# Altium PCB LM2587.PcbDoc
Units mm, origin at the board's own origin, x right, y up, seen from the top; angles counter-clockwise.
Board outline 56.5 x 36 mm, 2 copper layers (Top Layer, Bottom Layer), stack 1.571 mm thick; 11 components, 6 nets, 34 pads, 68 vias.
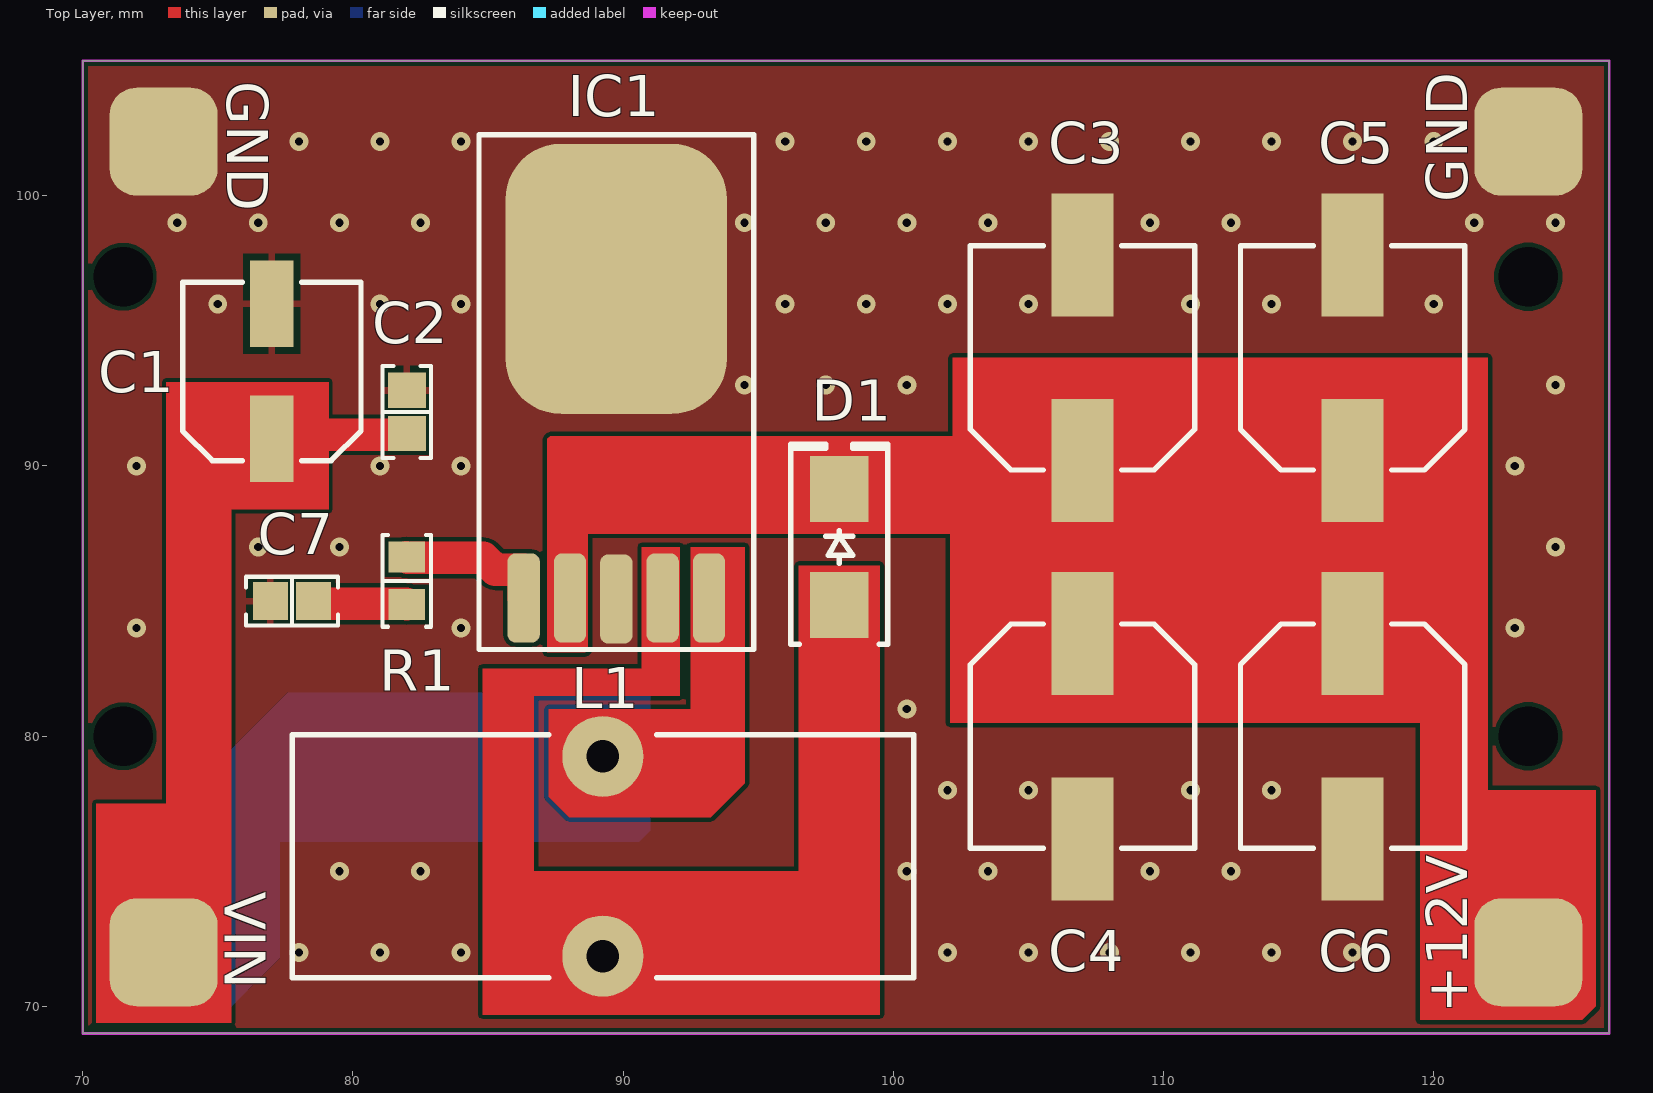
[diagram p0: Top Layer view]
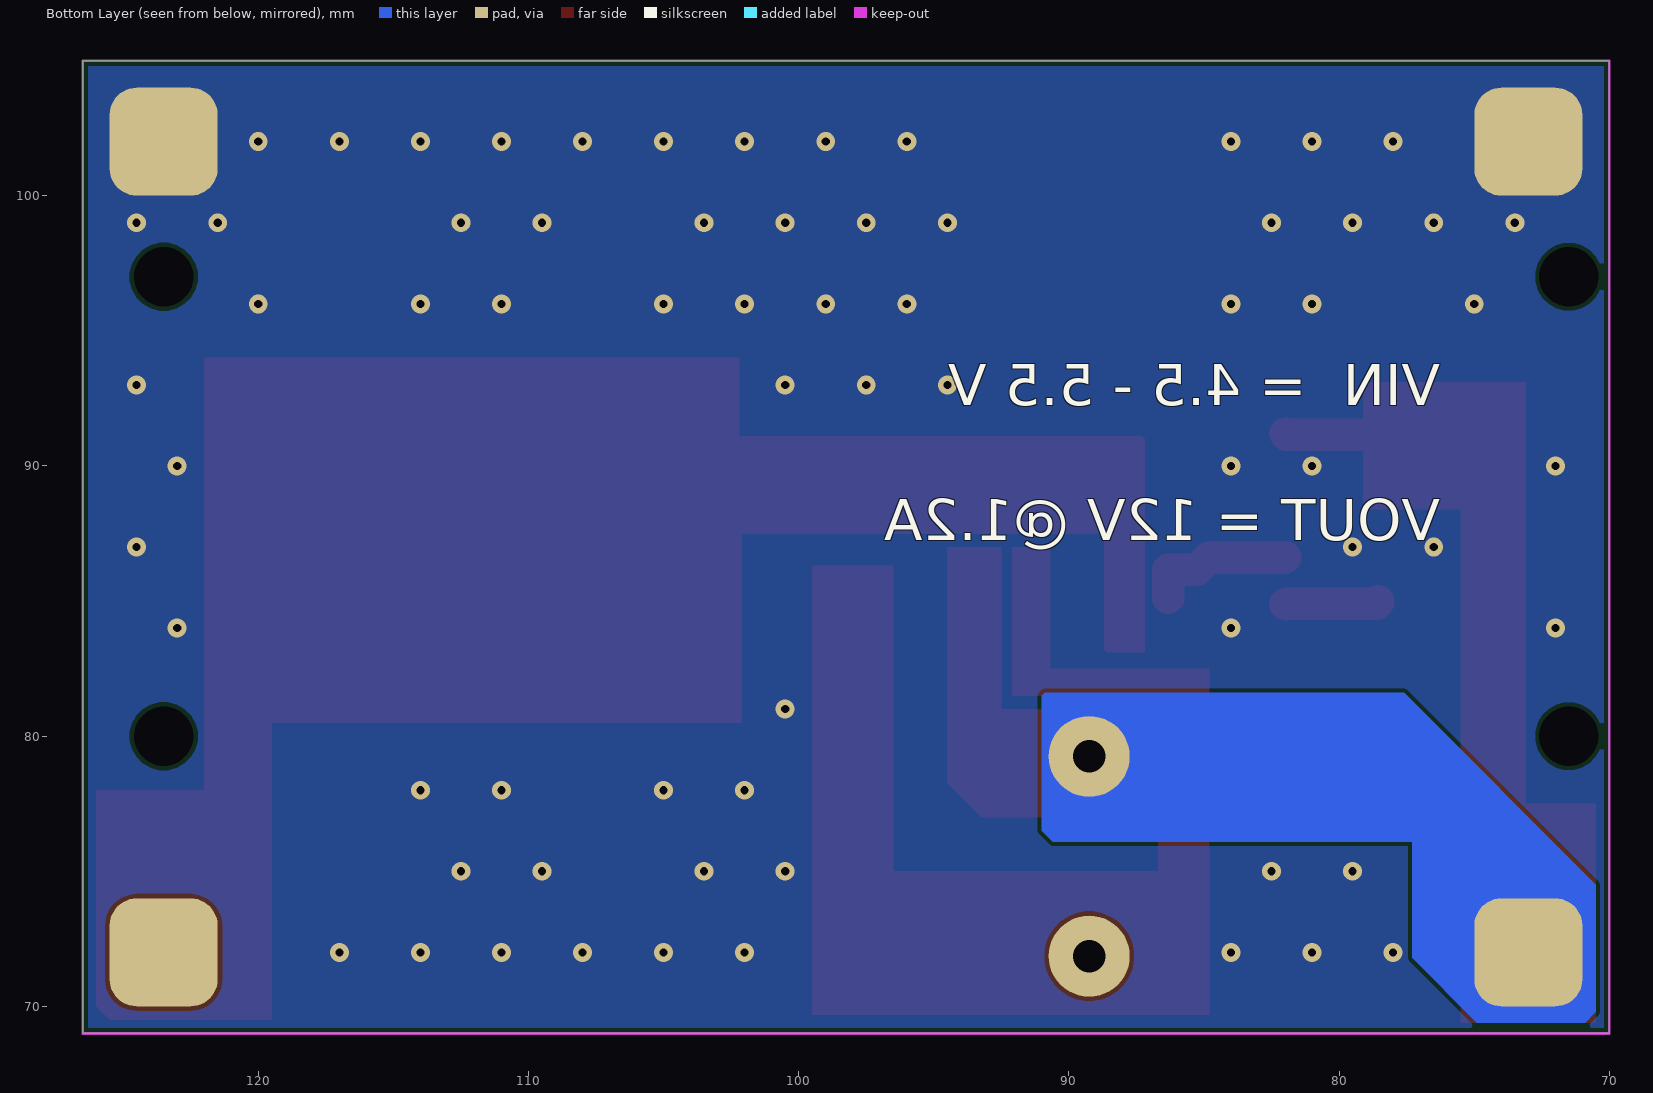
[diagram p1: Bottom Layer view, seen from below]
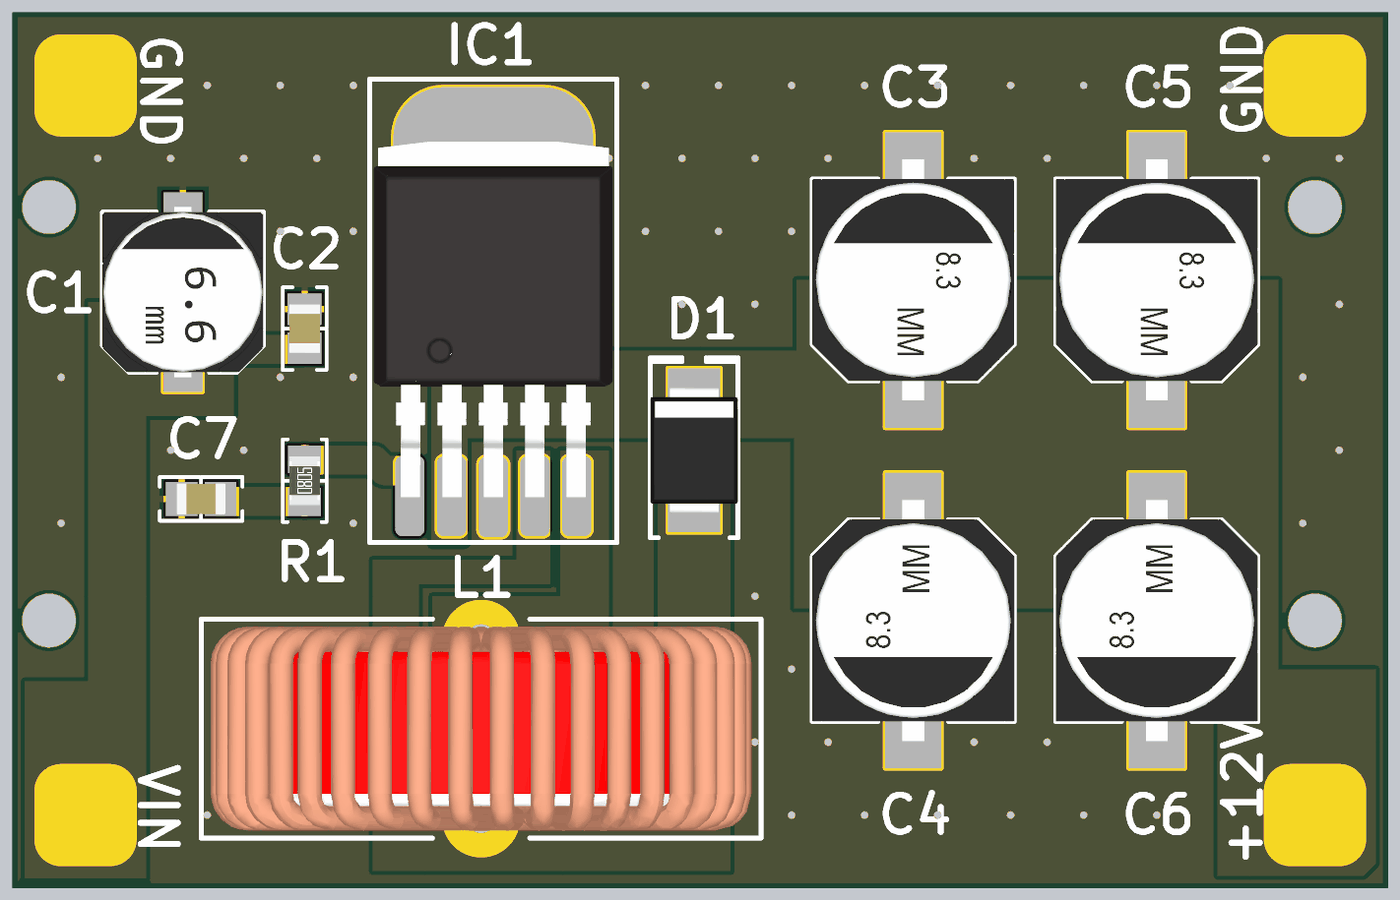
[diagram p2: 3D render of the assembled board from above, using the file's embedded part models]

## Layer stack, top to bottom
Top Solder: solder mask 0.0102, Solder Resist, Dk 3.5
Top Layer: signal copper 0.0356
Dielectric 1: dielectric 1.5, FR-4, Dk 4.8
Bottom Layer: signal copper 0.0356
Bottom Solder: solder mask 0.0102, Solder Resist, Dk 3.5

## Board outline
70,69 70,105 126.5,105 126.5,69

## Design rules (kind name [scope] priority, off if disabled: settings)
Clearance [All] p1: gap=0.152 ignorepadtopadclearanceinfootprint=FALSE
HoleSize [All] p1: absolutevalues=TRUE maxlimit=5 minlimit=0.025 maxpercent=80.000 minpercent=20.000
PolygonConnect [All] p1: connectstyle=Relief reliefconductorwidth=0.254 reliefentries=4 polygonreliefangle="90 Angle" airgapwidth=0.254
RoutingVias [All] p1: holewidth=0.711 width=1.27 viastyle="Through Hole" minholewidth=0.711 minwidth=1.27 maxholewidth=0.711 maxwidth=1.27
SolderMaskExpansion [All] p1: expansion=0.102 istentingtop=FALSE
Width [All] p1: maxlimit=2 minlimit=0.152 preferedwidth=1.2
29 further rules are at their usual default settings.

## Components (designator, comment, footprint, x,y, rotation, side; value= is the part's Value field where it differs from the comment)
C1 "100µF" "CAP ALSMD 6.6MM H5.4MM" 77,93.5 r90 top
C2 "0.1µF" "CAP 0805_2012" 82,92 r270 top
C3 "560µF" "CAP ALSMD 8.3MM H10.5MM" 107,94 r90 top
C4 "560µF" "CAP ALSMD 8.3MM H10.5MM" 107,80 r270 top
C5 "560µF" "CAP ALSMD 8.3MM H10.5MM" 117,94 r90 top
C6 "560µF" "CAP ALSMD 8.3MM H10.5MM" 117,80 r270 top
C7 "1µF" "CAP 0805_2012" 77.75,85 r0 top
D1 "STPS2L25U" "DO214AA SMB" 98,87 r90 top
IC1 "LM2587" "D2PAK - T0263" 89.75,91 r0 top
L1 "15µH" 7447070 89.25,75.555 r0 top
R1 "3 kOhms" "RES 0805_2012" 82,85.75 r90 top

## Footprints (in the part's own frame and the unit in brackets; to place one, negate y for a bottom-side part, rotate by r counter-clockwise, add the part's x,y. Pads: shape width x height; smd on the part's side, far side on the other; paste and mask are expansions set on the pad)
7447070 [mm] "0.984\" Dia x 0.433\" W (25.00mm x 11.00mm)"
  round 3 hole 1.2: 1(0,3.695) 2(0,-3.695)
  silkscreen extent -11.5,-4.5 11.5,4.5, body extent -11.11,-4.2 11.11,4.2, height 22.08
"CAP 0805_2012" [mm] "Chip Capacitor, 2-Leads, Body 2.00x1.20mm, IPC Medium Density"
  rect 1.3x1.4 smd: 1(-0.8,0) 2(0.8,0)
  silkscreen extent -1.7,-0.9 1.7,0.9, body extent -1,-0.64 1,0.64, height 1.26
"CAP ALSMD 6.6MM H5.4MM" [mm] "Aluminum Electrolytic Capacitor, Body 6.60x6.60x5.40mm, IPC Low Density"
  rect 3.2x1.6 smd: 1(-2.5,0) 2(2.5,0)
  silkscreen extent -3.3,-3.3 3.3,3.3, body extent -3.5,-3.3 3.5,3.3, height 5.4
"CAP ALSMD 8.3MM H10.5MM" [mm] "Aluminum Electrolytic Capacitor, Body 8.30x8.30x10.50mm, IPC Low Density"
  rect 4.55x2.3 smd: 1(-3.8,0) 2(3.8,0)
  silkscreen extent -4.15,-4.15 4.15,4.15, body extent -4.95,-4.15 4.95,4.15, height 10.5
"D2PAK - T0263" [mm]
  rrect50% 1.2x3.3 smd: 1(-3.429,-5.888) 2(-1.714,-5.888) 3(0,-5.923) 4(1.714,-5.888) 5(3.429,-5.888)
  rrect50% 8.2x10 smd: 3(0,5.923)
  silkscreen extent -5.08,-7.79 5.08,11.26, body extent -4.91,-5.92 4.91,8.68, height 4.22
"DO214AA SMB" [mm] "Molded Diode, 2-Leads, Body 4.31x3.62mm, IPC Medium Density"
  rect 2.45x2.15 smd: 1(-2.15,0) 2(2.15,0)
  silkscreen extent -3.6,-1.8 3.8,1.8, body extent -2.6,-1.8 2.6,1.8, height 2.4
"RES 0805_2012" [mm] "Chip Resistor, 2-Leads, Body 2.00x1.25mm, IPC Medium Density"
  rect 1.15x1.35 smd: 1(-0.875,0) 2(0.875,0)
  silkscreen extent -1.7,-0.9 1.7,0.9, body extent -1,-0.62 1,0.63, height 0.6

## Part data
C1: library part AVS107M16D16T-F, "CAP ALUM 100UF 20% 16V SMD", Device Package="Radial, Can - SMD", ESR (Equivalent Series Resistance)="4.3Ohm @ 120Hz", Lifetime @ Temp.="2000 Hrs @ 85°C", Manufacturer="Cornell Dubilier Electronics (CDE)", Operating Temperature="-40°C ~ 85°C", Ratings=AEC-Q200, Ripple Current @ High Frequency="119mA @ 10kHz", Ripple Current @ Low Frequency="70mA @ 120Hz", Supplier Part Number 1=338-3969-1-ND, Tolerance=±20%, Voltage - Rated=16V, Applications="Automotive, Bypass, Decoupling", Capacitance=100µF, ComponentLink1Description=Datasheet, ComponentLink1URL=http://www.cde.com/resources/catalogs/AVS.pdf, ComponentLink2Description="DigiKey Link", ComponentLink2URL=http://digikey.com/product-detail/en/cornell-dubilier-electronics-cde/AVS107M16D16T-F/338-3969-1-ND/5700222, Height - Seated (Max)="0.213\" (5.40mm)", LastUpdated="2.09.2020 01:18:33", Lifecycle Status=Active, Minimum Order=1, Mounting Type="Surface Mount", Package / Case="Radial, Can - SMD", Packaging=TapeAndReel, Part Number=AVS107M16D16T-F, Part Status=Active, PartId=8788, Polarization=Polar, Price=0.15, Series=AVS, Size / Dimension="0.248\" Dia (6.30mm)", Supplier 1=DigiKey, Surface Mount Land Size="0.260\" L x 0.260\" W (6.60mm x 6.60mm)"
C2: library part 08053E104ZAT2A, "CAP CER 0.1UF 25V Z5U 0805", Device Package="0805 (2012 Metric)", Manufacturer="AVX Corporation", Operating Temperature="10°C ~ 85°C", Supplier Part Number 1=478-12769-1-ND, Temperature Coefficient=Z5U, Tolerance="-20%, +80%", Voltage - Rated=25V, Applications="General Purpose", Capacitance=0.1µF, ComponentLink2Description="DigiKey Link", ComponentLink2URL=http://digikey.com/product-detail/en/avx-corporation/08053E104ZAT2A/478-12769-1-ND/9949310, LastUpdated="2.09.2020 01:04:40", Lifecycle Status=Active, Minimum Order=1, Mounting Type="Surface Mount, MLCC", Package / Case="0805 (2012 Metric)", Packaging=TapeAndReel, Part Number=08053E104ZAT2A, Part Status=Active, PartId=3602, Price=0.04, Series=-, Size / Dimension="0.079\" L x 0.049\" W (2.00mm x 1.25mm)", Supplier 1=DigiKey, Thickness (Max)="0.037\" (0.94mm)"
C3 C4 C5 C6: library part UCV1E561MNL1GS, "CAP ALUM 560UF 20% 25V SMD", Device Package="Radial, Can - SMD", Lifetime @ Temp.="2000 Hrs @ 105°C", Manufacturer=Nichicon, Operating Temperature="-55°C ~ 105°C", Ripple Current @ High Frequency="850mA @ 100kHz", Ripple Current @ Low Frequency="425mA @ 120Hz", Supplier Part Number 1=493-14353-1-ND, Tolerance=±20%, Voltage - Rated=25V, Applications="General Purpose", Capacitance=560µF, ComponentLink1Description=Datasheet, ComponentLink1URL=http://nichicon-us.com/english/products/pdfs/e-ucv.pdf, ComponentLink2Description="DigiKey Link", ComponentLink2URL=http://digikey.com/product-detail/en/nichicon/UCV1E561MNL1GS/493-14353-1-ND/5724340, Height - Seated (Max)="0.413\" (10.50mm)", LastUpdated="2.09.2020 01:25:15", Lifecycle Status=Active, Minimum Order=1, Mounting Type="Surface Mount", Package / Case="Radial, Can - SMD", Packaging=TapeAndReel, Part Number=UCV1E561MNL1GS, Part Status=Active, PartId=7550, Polarization=Polar, Price=0.41, Series=UCV, Size / Dimension="0.315\" Dia (8.00mm)", Supplier 1=DigiKey, Surface Mount Land Size="0.327\" L x 0.327\" W (8.30mm x 8.30mm)", Impedance="80 mOhms"
C7: library part C0805C105K3RACTU, "CAP CER 1UF 25V X7R 0805", Device Package="0805 (2012 Metric)", Manufacturer=KEMET, Operating Temperature="-55°C ~ 125°C", Supplier Part Number 1=399-8004-1-ND, Temperature Coefficient=X7R, Tolerance=±10%, Voltage - Rated=25V, Applications="Bypass, Decoupling", Capacitance=1µF, ComponentLink1Description=Datasheet, ComponentLink1URL=https://api.kemet.com/component-edge/download/datasheet/C0805C105K3RACTU.pdf, ComponentLink2Description="DigiKey Link", ComponentLink2URL=http://digikey.com/product-detail/en/kemet/C0805C105K3RACTU/399-8004-1-ND/3471727, LastUpdated="2.09.2020 01:04:42", Lifecycle Status=Active, Minimum Order=1, Mounting Type="Surface Mount, MLCC", Package / Case="0805 (2012 Metric)", Packaging=TapeAndReel, Part Number=C0805C105K3RACTU, Part Status=Active, PartId=2575, Price=0.02, Series="SMD Comm X7R", Size / Dimension="0.079\" L x 0.049\" W (2.00mm x 1.25mm)", Supplier 1=DigiKey, Thickness (Max)="0.055\" (1.40mm)"
D1: "DIODE SCHOTTKY 25V 2A SMB", Current - Average Rectified (Io)=2A, Current - Reverse Leakage @ Vr="90µA @ 25V", Manufacturer=STMicroelectronics, Operating Temperature - Junction="150°C (Max)", Package / Case="DO-214AA, SMB", Supplier Device Package=SMB, Supplier Part Number 1=497-5573-1-ND, Voltage - DC Reverse (Vr) (Max)=25V, Voltage - Forward (Vf) (Max) @ If="450mV @ 2A", ComponentLink1Description=Datasheet, ComponentLink1URL=http://www.st.com/content/ccc/resource/technical/document/datasheet/f9/71/8b/51/48/04/4b/9b/CD00001325.pdf/files/CD00001325.pdf/jcr:content/translations/en.CD00001325.pdf, ComponentLink2Description="DigiKey Link", ComponentLink2URL=http://digikey.com/product-detail/en/stmicroelectronics/STPS2L25U/497-5573-1-ND/1209742, Diode Type=Schottky, LastUpdated="2.09.2020 01:18:51", Lifecycle Status=Active, Minimum Order=1, Mounting Type="Surface Mount", Packaging=TapeAndReel, Part Number=STPS2L25U, Part Status=Active, PartId=1621, Price=0.08, Series=-, Speed="Fast Recovery =< 500ns, > 200mA (Io)", Supplier 1=DigiKey
L1: library part SLF10165T-150M3R13PF, "FIXED IND 15UH 3.1A 27 MOHM SMD", Current - Saturation=3.1A, DC Resistance (DCR)="32.4mOhm Max", Device Package=Nonstandard, Manufacturer="TDK Corporation", Operating Temperature="-40°C ~ 105°C", Supplier Part Number 1=445-6479-1-ND, Tolerance=±20%, Inductance Frequency - Test=100kHz, ComponentLink1Description=Datasheet, ComponentLink1URL=https://product.tdk.com/info/en/catalog/datasheets/inductor_commercial_power_slf10165_en.pdf?ref_disty=digikey, ComponentLink2Description="DigiKey Link", ComponentLink2URL=http://digikey.com/product-detail/en/tdk-corporation/SLF10165T-150M3R13PF/445-6479-1-ND/2465805, Current Rating (Amps)=3.1A, Height - Seated (Max)="0.268\" (6.80mm)", LastUpdated="2.09.2020 01:22:12", Lifecycle Status=Active, Material - Core=Ferrite, Minimum Order=1, Mounting Type="Surface Mount", Package / Case=Nonstandard, Packaging=TapeAndReel, Part Number=SLF10165T-150M3R13PF, Part Status=Active, PartId=99, Price=0.59, Series=SLF, Shielding=Shielded, Size / Dimension="0.398\" L x 0.398\" W (10.10mm x 10.10mm)", Supplier 1=DigiKey, Type=Wirewound, Inductance=15µH
R1: library part RPC0805JT3K00, "RES 3K OHM 5% 1/4W 0805", Device Package="0805 (2012 Metric)", Manufacturer="Stackpole Electronics Inc", Operating Temperature="-55°C ~ 155°C", Power (Watts)="0.25W, 1/4W", Ratings=AEC-Q200, Supplier Device Package=0805, Supplier Part Number 1=RPC0805JT3K00CT-ND, Temperature Coefficient=±100ppm/°C, Tolerance=±5%, ComponentLink1Description=Datasheet, ComponentLink1URL=https://www.seielect.com/catalog/sei-rpc.pdf, ComponentLink2Description="DigiKey Link", ComponentLink2URL=http://digikey.com/product-detail/en/stackpole-electronics-inc/RPC0805JT3K00/RPC0805JT3K00CT-ND/5766019, Composition="Thick Film", Features="Automotive AEC-Q200, Pulse Withstanding", Height - Seated (Max)="0.024\" (0.60mm)", LastUpdated="2.09.2020 01:14:56", Lifecycle Status=Active, Minimum Order=1, Number of Terminations=2, Package / Case="0805 (2012 Metric)", Packaging=TapeAndReel, Part Number=RPC0805JT3K00, Part Status=Active, PartId=40639, Price=0.02, Resistance="3 kOhms", Series=RPC, Size / Dimension="0.079\" L x 0.049\" W (2.00mm x 1.25mm)", Supplier 1=DigiKey

## Free pads (board coordinates)
  rect 0x0 hole 2.2: GND(71.5,80) GND(71.5,97) GND(123.5,80) GND(123.5,97)
  rrect50% 4x4 all layers, no hole: GND(73,102) GND(123.5,102) VCC(73,72) VOUT(123.5,72)

## Via types
v1: diameter 0.7, hole 0.3, Top Layer to Bottom Layer, tented both sides, 68 vias

## Nets (pads, with @x,y where several pads share a name; then routed paths per layer and width w, separated by ;. In a path a pad name is that pad's centre, name@x,y a point inside that pad or via, vN(x,y) a via of type N, cw(c..) or ccw(c..) an arc to the next point about the centre after c; other vN are vias at no path point)
+12: C3.1 C4.1 C5.1 C6.1 D1.2 IC1.2 pad.VOUT
GND: C1.2 C2.1 C3.2 C4.2 C5.2 C6.2 C7.1 IC1.3 pad.GND@73,102 pad.GND@123.5,102
  other v1: 78,72 81,72 84,72 102,72 105,72 108,72 111,72 114,72 117,72 79.5,75 82.5,75 100.5,75 103.5,75 109.5,75 112.5,75 102,78 105,78 111,78 114,78 100.5,81 72,84 84,84 123,84 76.5,87 79.5,87 124.5,87 72,90 81,90 84,90 123,90 94.5,93 97.5,93 100.5,93 124.5,93 75,96 81,96 84,96 96,96 99,96 102,96 105,96 111,96 114,96 120,96 73.5,99 76.5,99 79.5,99 82.5,99 94.5,99 97.5,99 100.5,99 103.5,99 109.5,99 112.5,99 121.5,99 124.5,99 78,102 81,102 84,102 96,102 99,102 102,102 105,102 108,102 111,102 114,102 117,102 120,102
NetC7_2: C7.2 R1.1 | length 3.5
  Top Layer w1.2: C7.2 78.55,84.95 78.6,84.9 81.975,84.9 R1.1
NetD1_1: D1.1 IC1.4 L1.2
NetR1_2: IC1.1 R1.2 | length 5.6
  Top Layer w1.2: R1.2 82.025,86.6 84.833,86.6 85.271,86.162 86.321,86.162 IC1.1
VCC: C1.1 C2.2 IC1.5 L1.1 pad.VCC | length 5.1
  Top Layer w1.2: C1.1 77.15,91.15 81.95,91.15 C2.2

## Polygon pours and split planes (outlines as drawn)
GND on Bottom Layer "GND_L02_P000" (solid, pour order 0): 70,105 126.5,105 126.5,69 70,69
GND on Top Layer "GND_L01_P006" (solid, pour order 6): 70,105 126.5,105 126.5,69 70,69

## Keep-outs
Keep-Out Layer:
  the board outline again, w0.1

## Other copper
Top Layer:
  region net +12: 122,78 126,78 126,70 125.5,69.5 119.5,69.5 119.5,80.5 102.1,80.5 102.1,87.5 88.7,87.5 88.7,83.2 88.6,83.1 87.2,83.1 87.2,91 87.3,91.1 102.2,91.1 102.2,94 122,94
  region net VCC: 75.5,88.4 75.5,69.4 70.5,69.4 70.5,77.5 73.1,77.5 73.1,93 73.1,93.1 79.1,93.1 79.1,88.4
  region net NetD1_1: 90.7,87 92.1,87 92.1,81.5 86.7,81.5 86.7,75 96.5,75 96.5,86.3 99.5,86.3 99.5,69.7 84.8,69.7 84.8,82.5 90.7,82.5
  region net VCC: 92.5,87 92.5,81 87.25,81 87.25,77.75 88,77 93.25,77 94.5,78.25 94.5,87
Bottom Layer:
  region net VCC: 91,81.5 91,76.5 90.6,76.1 77.3,76.1 77.3,71.8 74.9,69.4 70.9,69.4 70.5,69.8 70.5,74.5 77.6,81.6 90.9,81.6

## Silkscreen, mask and mechanical layers (free items; w line width, h text height)
Top Overlay:
  text "GND" at 75.354,104.246 h1.52 r270
  text "GND" at 121.246,99.754 h1.52 r90
  text "VIN" at 75.254,74.246 h1.52 r270
  text "+12V" at 121.246,69.754 h1.52 r90
Bottom Overlay:
  text "VIN  = 4.5 - 5.5 V" at 76.254,92.254 h1.52
  text "VOUT = 12V @1.2A" at 76.254,87.254 h1.52